# EAGLE board AD849x_Thermo (EAGLE 9.4.2)
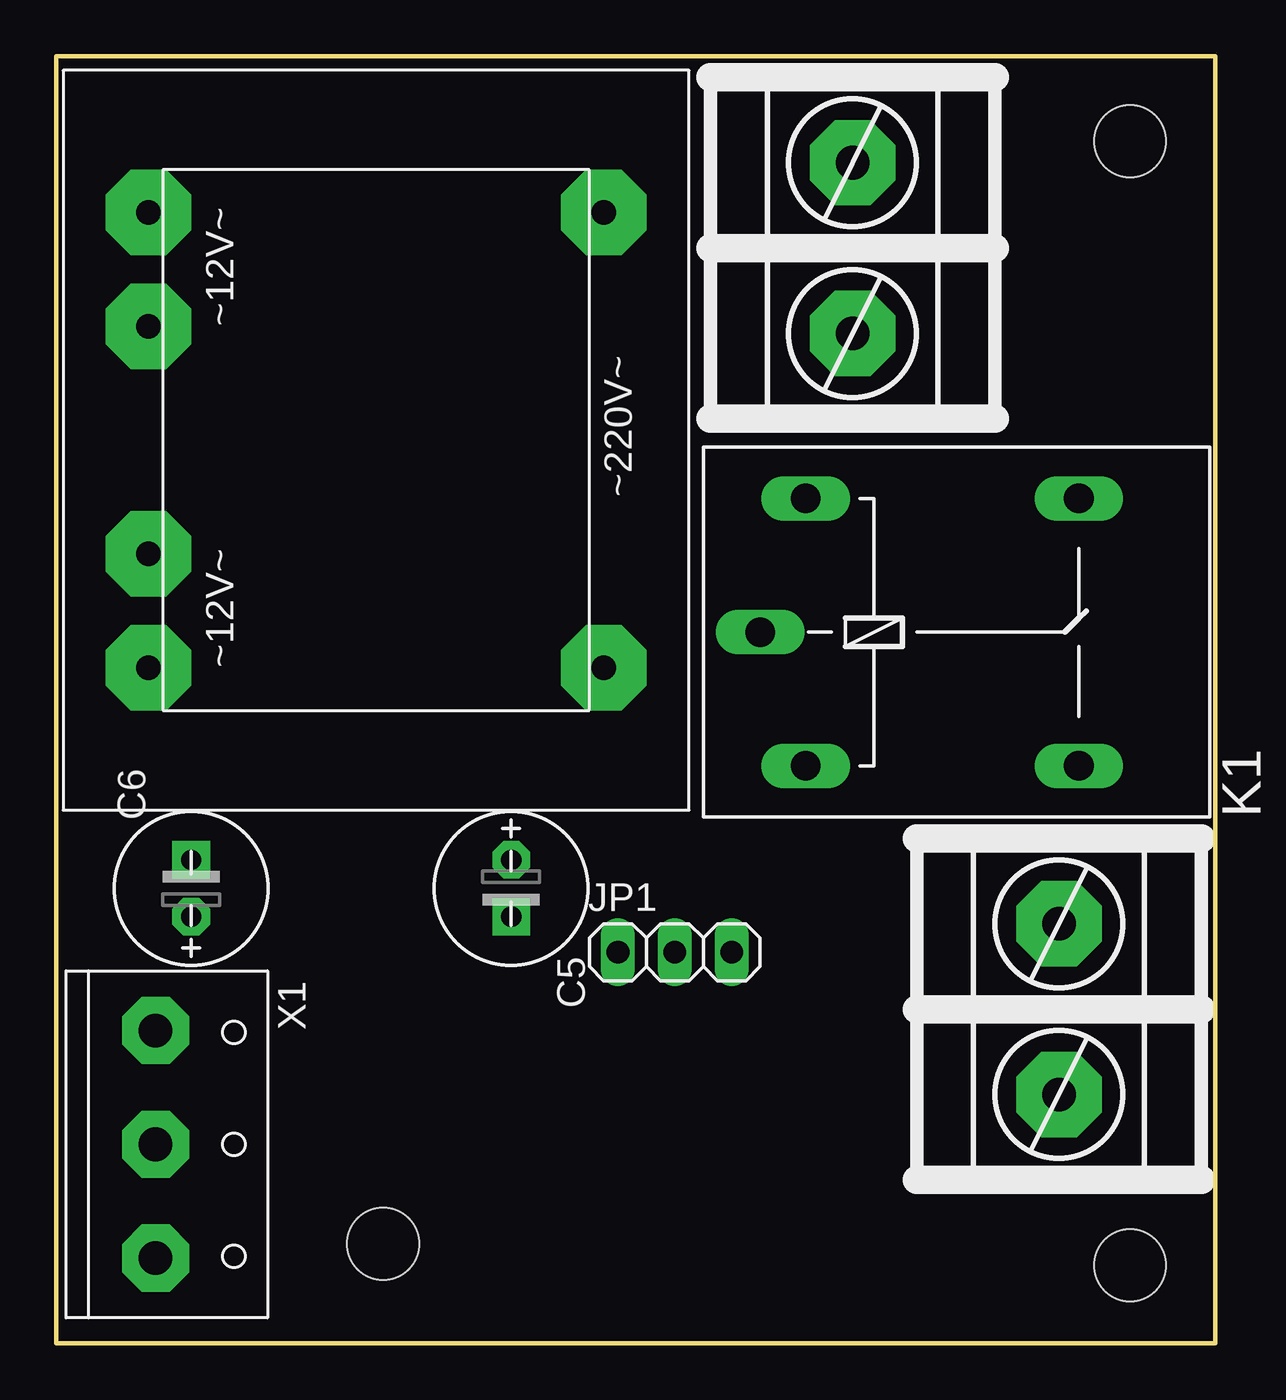
[diagram p0: board, top side]
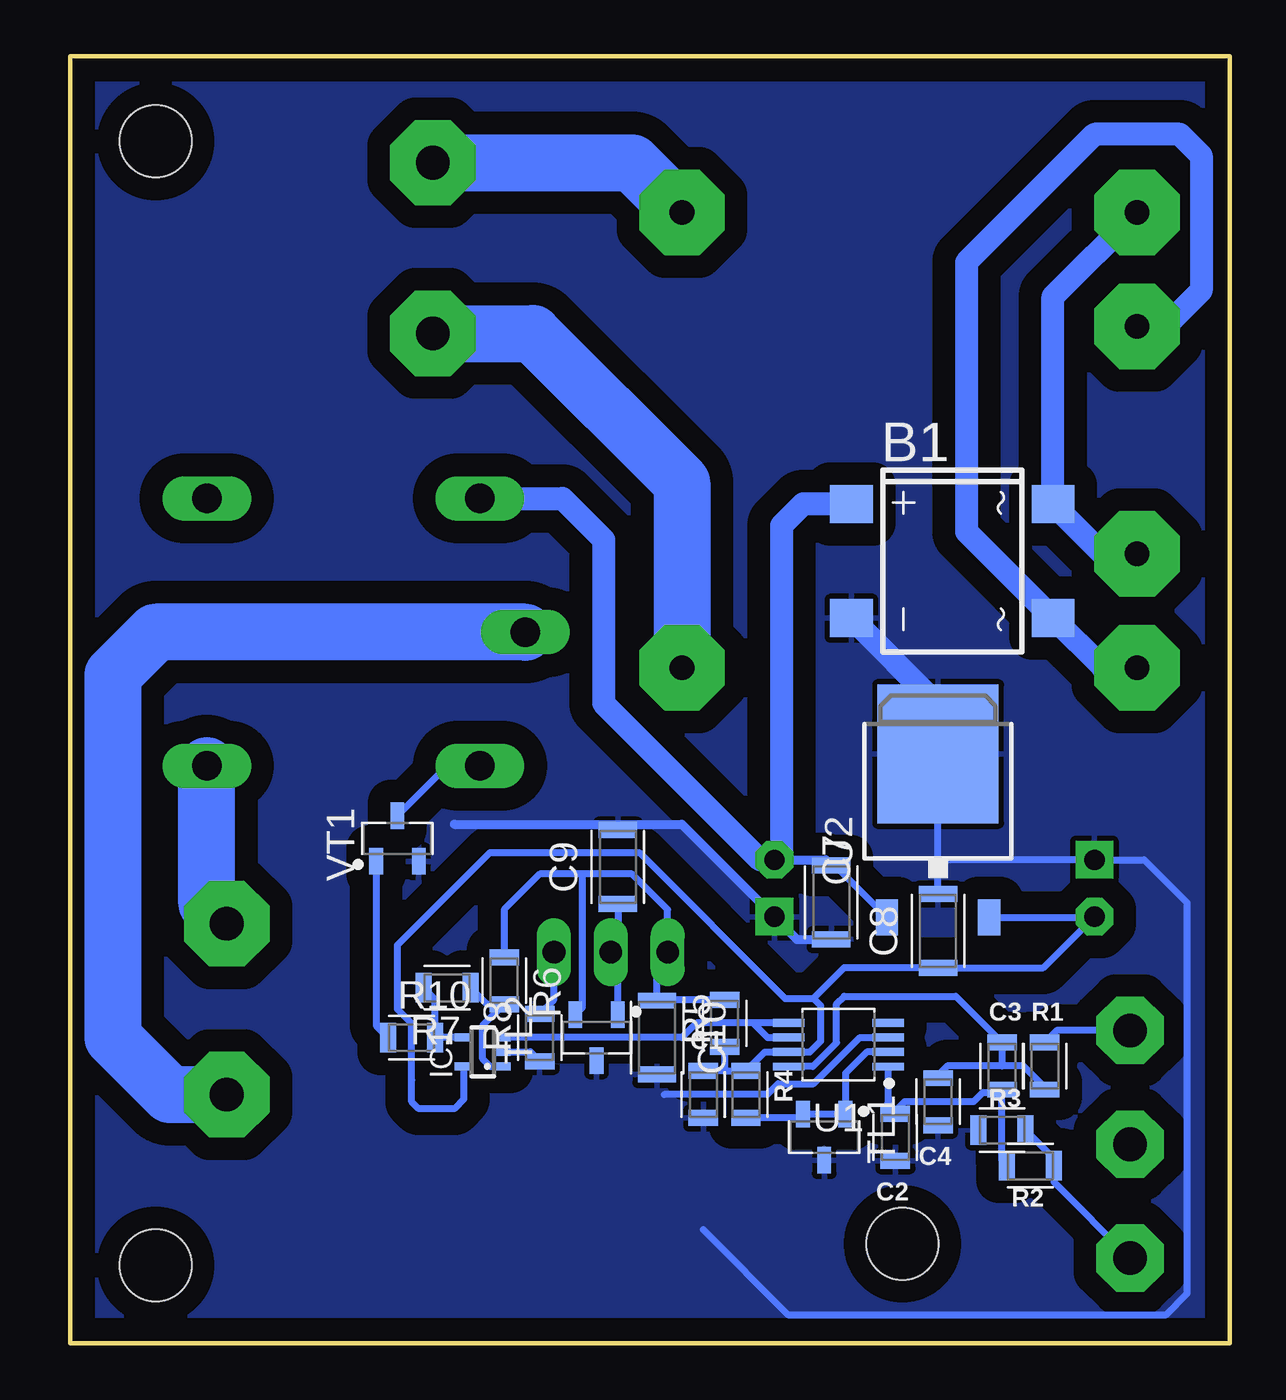
[diagram p1: board, bottom side, seen from below]

Size 51.75 x 57.47 mm. Coordinates in mm from the lower left corner, seen from the top.
Outline: 0,0 51.75,0 51.75,57.47 0,57.47 0,0
Copper layers (1*16): Top 0.035mm / dielectric 1.5mm / Bottom 0.035mm
Design rules "EagleDesignRules": minimum track width 0.25mm, minimum drill 0.3mm, track to track 0.25mm, track to pad 0.25mm, pad to pad 0.25mm, via to via 0.25mm, smd to smd 0.25mm, copper to edge 0.5mm, drill to drill 0.5mm, minimum pad ring 10mil, minimum via ring 8mil, stop-mask expansion 4mil, vias tented up to drill 0mil, thermal gap 0.25mm
Holes 3.2 mm at 47.94,3.49 47.94,53.66 14.61,4.45

## Footprints (pad centres in the part's own frame; a part is rotated, then mirrored left to right if it is on the bottom)
DBS = smd 1.7 x 1.9: + -2.55,-4.5; - 2.55,-4.5; AC1 -2.55,4.5; AC2 2.55,4.5
CAP0805 = smd 0.712 x 1.312: 1 -1.05,0; 2 1.05,0
E2,5-7 = drill 0.9 pad 1.676 octagon: + -1.27,0 | drill 0.9 pad 1.676 square: - 1.27,0
CAP1206 = smd 0.712 x 1.712: 1 -1.65,0; 2 1.65,0
SC70-5L = smd 0.35 x 0.8: 1 -0.65,-0.85; 2 0,-0.85; 3 0.65,-0.85; 4 0.65,0.85; 5 -0.65,0.85
1X03 = drill 1.016 long: 1 -2.54,0; 2 0,0; 3 2.54,0
G5LE = drill 1.321 long: 1 -7.493,-5.969; 2 -7.493,5.969; O 4.699,5.969; P -9.525,0; S 4.699,-5.969
RESC2012X50 = smd 0.712 x 1.312: 1 -1.05,0; 2 1.05,0
SOT95P240X115-3 = smd 1.18 x 0.609: 1 -1.024,0.95; 2 -1.024,-0.95; 3 1.024,0
MSOP-8 = smd 1.424 x 0.35: 1 -2.219,0.975; 2 -2.219,0.325; 3 -2.219,-0.325; 4 -2.219,-0.975; 5 2.219,-0.975; 6 2.219,-0.325; 7 2.219,0.325; 8 2.219,0.975
DPAK = smd 1 x 1.6: 1 -2.28,-4.8; 3 2.28,-4.8 | smd 5.4 x 6.2: 2(PAD) 0,2.5
32.5-27.5-22 = drill 1.1 pad 3.81 octagon: 1 -10.16,-10.16; 5 10.16,-10.16; 6 10.16,10.16; 7 5.08,10.16; 9 -5.08,10.16; 10 -10.16,10.16
MKDSN1,5/3-5,08 = drill 1.5 pad 3 octagon: 1 -5.08,0; 2 0,0; 3 5.08,0
KF25C-7.62-02P-13 = drill 1.5 pad 3.81 octagon: P$1 -3.81,0; P$2 3.81,0

## Placement (x,y rotation side)
B1  [DBS]  12.38,34.92 270 bottom
C1  0.1µF  [CAP0805]  23.5,11.11 90 bottom
C2  0.01uF  [CAP0805]  14.92,9.21 270 bottom
C3  0.1uF  [CAP0805]  10.16,12.38 270 bottom
C4  0.01uF  [CAP0805]  13.02,10.79 90 bottom
C5  470u 25V  [E2,5-7]  20.32,20.32 270 top
C6  470u 25V  [E2,5-7]  6.03,20.32 90 top
C7  470n  [CAP1206]  17.78,19.68 270 bottom
C8  470n  [CAP1206]  13.02,18.41 90 bottom
C9  [CAP1206]  27.3,21.27 90 bottom
C10  [CAP1206]  25.56,13.65 270 bottom
IC1  OP-AMP-1TSV521ICT  [SC70-5L]  33.34,13.02 90 bottom
JP1  [1X03]  27.62,17.46 0 top
K1  G5LE  [G5LE]  40.96,31.75 0 top
R1  100  [RESC2012X50]  8.26,12.38 270 bottom
R2  100  [RESC2012X50]  8.89,7.94 180 bottom
R3  1M  [RESC2012X50]  10.16,9.53 0 bottom
R4  1K  [RESC2012X50]  21.59,11.11 270 bottom
R5  1K  [RESC2012X50]  22.54,14.29 90 bottom
R6  750  [RESC2012X50]  32.38,16.19 270 bottom
R7  82K  [RESC2012X50]  34.92,15.88 180 bottom
R8  10K  [RESC2012X50]  30.8,13.65 90 bottom
R10  100  [RESC2012X50]  36.51,13.65 0 bottom
TL1  TLV431ACDBZR  [SOT95P240X115-3]  18.1,9.21 270 bottom
TL2  TLV431ACDBZR  [SOT95P240X115-3]  28.26,13.65 270 bottom
U1  AD8495ARMZ  [MSOP-8]  17.46,13.34 180 bottom
U2  [DPAK]  13.02,23.81 0 bottom
U$9  TRANS-1/2220-12X2  [32.5-27.5-22]  14.29,40.32 90 top
VT1  [SOT95P240X115-3]  37.15,22.54 90 bottom
X1  CON-5.08-03P  [MKDSN1,5/3-5,08]  4.45,8.89 270 top
X2  CON-7.62-02P  [KF25C-7.62-02P-13]  44.77,14.92 90 top
X3  CON-7.62-02P  [KF25C-7.62-02P-13]  35.56,48.9 90 top

## Library data of the parts
B1 C1-C10 IC1 R1-R8 R10 TL1 TL2 U1 U2 U$9 VT1 X1-X3 = Flamberm
JP1 = pinhead
K1 = relay; OC_FARNELL: unknown; OC_NEWARK: unknown

## Nets
+5V: C1.2 C6.+ C8.1 IC1.5 R4.1 R5.1 U1.7 U2.3
+12V: B1.+ C5.+ C7.1 K1.2 U2.1
GND: B1.- C1.1 C2.2 C4.1 C5.- C6.- C7.2 C8.2 C9.2 C10.2 IC1.2 R3.1 R8.1 TL1.3 TL2.3 U1.3 U2.2(PAD) VT1.2
IN+: R1.1 X1.1
IN-: R2.1 R3.2 X1.3
N$1: R4.2 TL1.1 TL1.2 U1.2
N$2: C3.1 C4.2 R1.2 U1.8
N$3: C2.1 C3.2 R2.2 U1.1
N$4: C10.1 JP1.1 R5.2 R6.1 TL2.2
N$5: IC1.4 R7.2 R10.2
N$6: IC1.1 R6.2 R7.1
N$7: JP1.3 R8.2
N$8: C9.1 JP1.2 TL2.1
N$9: R10.1 VT1.1
N$10: K1.1 VT1.3
N$11: K1.P X2.P$1
N$12: K1.S X2.P$2
N$13: U$9.5 X3.P$2
N$14: U$9.1 X3.P$1
N$15: B1.AC1 U$9.6 U$9.9
N$16: B1.AC2 U$9.7 U$9.10
VOUT1: IC1.3 U1.5 U1.6

## Tracks (layer width: path | path; a pad name or v marks a point on that pad's centre or on a via)
+5V
  Bottom 0.305: 22.54,12.16 R4.1 20.74,13.01 U1.7 18.74,13.01 18.26,13.49 18.26,15.08 18.57,15.4 | R5.1 22.54,12.16 | IC1.5 34.19,10.9 34.61,10.48 36.2,10.48 36.51,10.79 36.51,11.75 36.51,14.29 37.15,14.92 37.15,17.78 33.02,21.91 26.35,21.91 19.84,15.4 18.57,15.4 | U2.3 6.07,19.01 C6.+ 8.32,16.77 C8.1 17.21,16.77 18.57,15.4 | 22.54,12.16 C1.2
+12V
  Bottom 0.305: 17.62,21.34 U2.1
  Bottom 0.406: C5.+ 18.04,21.59 C7.1 17.62,21.34
  Bottom 1.016: K1.2 29.78,37.72 27.94,35.88 27.94,28.57 20.95,21.59 C5.+ 20,21.91 20,36.51 19.04,37.48 B1.+
GND
  Bottom 0.305: 14.61,8.16 C2.2 15.05,8.03 | 25.23,11.11 20.64,11.11 20.16,11.59 18.57,11.59 16.5,13.66 U1.3 | IC1.2 31.21,13.02 R8.1 | C8.2 13.02,21.59 | 13.02,21.59 13.02,25.72 13.34,26.04 13.02,26.04 12.74,26.31 U2.2(PAD) | 13.02,21.59 C6.- 3.81,21.59 1.91,19.68 1.91,2.22 2.86,1.27 19.68,1.27 23.5,5.08
  Bottom 0.406: C7.2 19.3,18.04 C5.- 24.45,23.18 34.61,23.18
  Bottom 1.016: B1.- 13.02,28.51 13.02,26.04
  pour Bottom (isolate 1.016): 0.32,57.47 0.32,0 51.75,0 51.75,57.47
IN+
  Bottom 0.305: X1.1 7.72,13.97 R1.1
IN-
  Bottom 0.305: X1.3 7.84,7.21 R2.1 7.84,8.26 R3.2
N$1
  Bottom 0.305: U1.2 16.2,13.01 17.15,12.06 TL1.1 TL1.2 19.22,10.06 R4.2
N$2
  Bottom 0.305: R1.2 8.26,11.43 9.21,12.38 10.16,12.38 | 10.16,12.38 C3.1 12.23,15.5 17.2,15.5 17.54,15.16 17.54,13.42 18.61,12.36 U1.8 | 10.16,12.38 12.61,12.38 13.02,11.97 C4.2
N$3
  Bottom 0.305: R2.2 10.16,8.16 10.16,11.11 | 10.16,11.11 C3.2 | 10.16,11.11 10.26,11.21 11.02,11.21 11.43,10.79 14.51,10.79 14.92,10.38 | 14.92,10.38 15.26,10.72 15.24,10.74 U1.1 | 14.92,10.38 C2.1
N$4
  Bottom 0.305: 28.89,20.95 26.67,20.95 25.08,19.37 JP1.1 25.56,16.99 C10.1 25.52,15.34 R5.2 | 28.89,20.95 30.8,20.95 32.38,19.37 R6.1 | TL2.2 28.89,14.99 28.89,20.95
N$5
  Bottom 0.305: IC1.4 34.2,13.65 R10.2 35.46,15.36 R7.2
N$6
  Bottom 0.305: R7.1 33.14,15.14 R6.2 33.34,14.19 33.34,12.7 33.01,12.37 IC1.1
N$7
  Bottom 0.305: JP1.3 30.16,15.34 R8.2
N$8
  Bottom 0.305: C9.1 27.3,17.78 JP1.2 27.31,17.15 TL2.1
N$9
  Bottom 0.305: VT1.1 38.1,14.19 R10.1
N$10
  Bottom 0.305: VT1.3 34.93,25.78 K1.1
N$11
  Bottom 2.54: K1.P 47.94,31.75 49.85,29.84 49.85,13.65 47.31,11.11 X2.P$1
N$12
  Bottom 2.54: X2.P$2 45.66,19.62 K1.S
N$13
  Bottom 2.54: X3.P$2 26.67,52.7 U$9.5
N$14
  Bottom 2.54: X3.P$1 31.11,45.09 24.45,38.42 U$9.1
N$15
  Bottom 1.016: U$9.9 5.65,35.24 B1.AC1 7.88,46.73 U$9.6
N$16
  Bottom 1.016: U$9.10 5.67,30.16 B1.AC2 11.75,36.24 11.75,48.26 6.03,53.98 2.22,53.98 1.27,53.02 1.27,46.99 2.86,45.4 U$9.7
VOUT1
  Bottom 0.305: IC1.3 32.47,13.65 24.45,13.65 23.79,14.31 21.59,14.31 21.27,14.31 | 21.27,14.31 20.62,13.66 U1.6 | U1.5 21.27,14.31